# Altium PCB AICat V1.3.双面板 板厚1.6mm.PcbDoc (part 3 of 3)
Units mm, origin at the board's own origin, x right, y up, seen from the top; angles counter-clockwise.
Board outline 152.4 x 101.6 mm, 2 copper layers (Top Layer, Bottom Layer); 95 components, 81 nets, 296 pads, 205 vias.
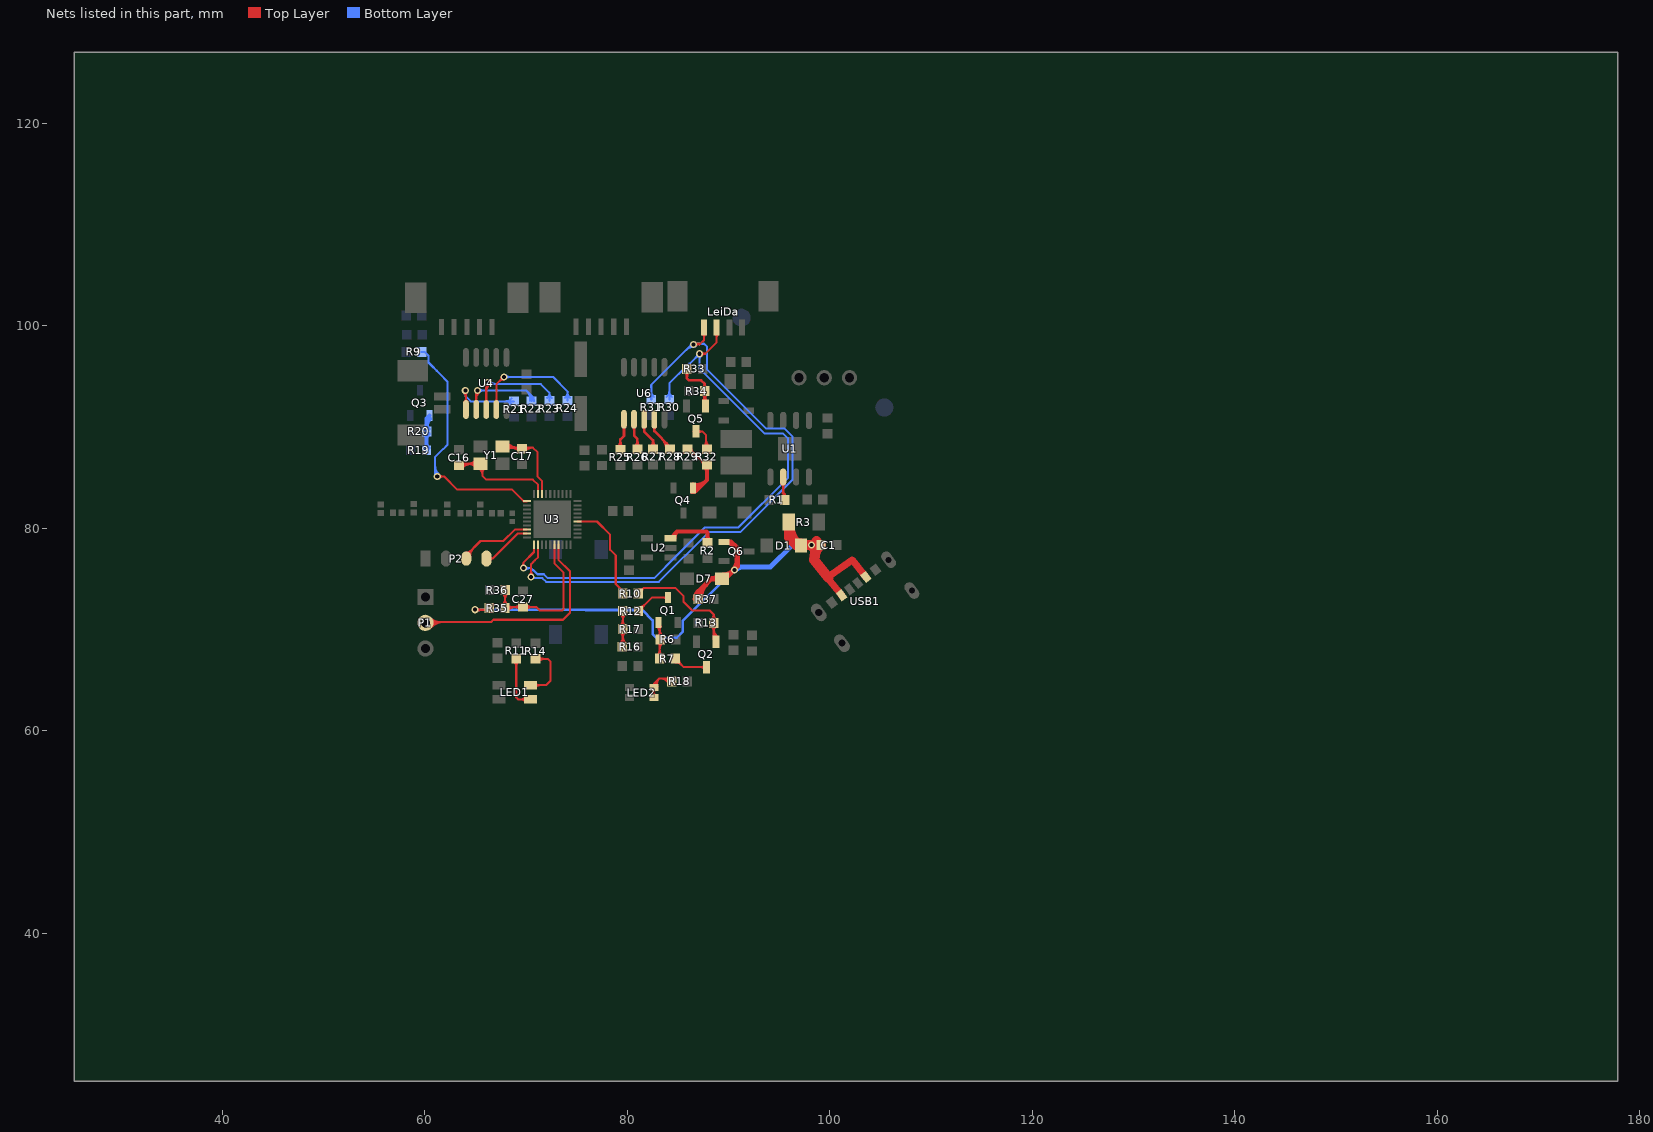
[diagram p3: the nets of this part, all layers, seen from the top]

## Via types
v1: diameter 0.7, hole 0.4, Top Layer to Bottom Layer, tented both sides, 205 vias

## Nets (pads, with @x,y where several pads share a name; then routed paths per layer and width w, separated by ;. In a path a pad name is that pad's centre, name@x,y a point inside that pad or via, vN(x,y) a via of type N, cw(c..) or ccw(c..) an arc to the next point about the centre after c; other vN are vias at no path point) (continued)
NetLED1_3: LED1.3 R11.1 | length 10.4
  Top Layer w0.203: R11.1@69.037,67.124 69.037,63.297 69.24,63.094 70.424,63.094 LED1.3@70.435,63.105 ; 69.037,66.247 cw(c69.915,66.247) 69.294,66.867 ccw(c69.915,66.247) 69.037,66.247 ; 69.037,66.247 ccw(c68.16,66.247) 68.78,66.867 cw(c68.16,66.247) 69.037,66.247 ; 69.423,63.094 ccw(c69.423,63.876) 69.977,63.323 cw(c69.423,63.876) 69.423,63.094 ; 69.477,63.094 cw(c69.477,62.387) 69.977,62.887 ccw(c69.477,62.387) 69.477,63.094
NetLED1_4: LED1.4 R14.1 | length 10.8
  Top Layer w0.203: LED1.4@70.435,64.505 71.972,64.505 72.441,64.973 72.441,66.827 72.161,67.107 70.95,67.107 R14.1@70.942,67.099 ; 71.419,64.505 cw(c71.419,65.249) 70.893,64.723 ccw(c71.419,65.249) 71.419,64.505 ; 71.419,64.505 ccw(c71.419,63.76) 70.893,64.287 cw(c71.419,63.76) 71.419,64.505 ; R14.1@71.224,66.842 cw(c71.864,66.202) 71.864,67.107 ccw(c71.864,66.202) R14.1@71.224,66.842 ; R14.1@71.224,67.356 ccw(c71.825,67.957) 71.825,67.107 cw(c71.825,67.957) R14.1@71.224,67.356
NetLED2_2: LED2.2 LED2.4 R18.2 | length 14.7
  Top Layer w0.203: LED2.4@82.632,63.279 LED2.2@82.632,64.279 82.632,64.649 ; 83.55,65.176 cw(c83.55,64.304) R18.2@84.265,64.805 ; R18.2@83.941,65.176 cw(c83.941,64.577) R18.2@84.431,64.921 ; R18.2@84.099,64.688 ccw(c83.16,64.03) 83.16,65.176 ; R18.2@84.396,64.872 84.091,65.176 83.16,65.176 ; 82.632,63.68 cw(c83.232,63.68) 82.808,64.104 ccw(c83.232,63.68) 82.632,63.68 ; 82.632,63.68 ccw(c82.033,63.68) 82.457,64.104 cw(c82.033,63.68) 82.632,63.68 ; 82.632,63.879 cw(c82.033,63.879) 82.457,63.455 ccw(c82.033,63.879) 82.632,63.879 ; 82.632,63.879 ccw(c83.232,63.879) 82.808,63.455 cw(c83.232,63.879) 82.632,63.879 ; 82.632,64.649 cw(c82.481,64.649) 82.538,64.509 ccw(c82.481,64.649) 82.632,64.649 ; 82.632,64.649 ccw(c82.783,64.649) 82.726,64.509 cw(c82.783,64.649) 82.632,64.649 ; 82.632,64.649 83.16,65.176 ; 83.16,65.176 ccw(c83.723,64.613) 82.968,64.359 cw(c83.723,64.613) 83.16,65.176 ; LED2.2@82.583,64.229 cw(c83.03,64.379) 82.696,64.713 ccw(c83.03,64.379) LED2.2@82.583,64.229 ; LED2.2@82.775,64.294 cw(c83.376,64.496) 82.928,64.945 ccw(c83.376,64.496) LED2.2@82.775,64.294
NetQ1_1: Q1.1 R6.2 R7.1 | length 15.1
  Top Layer w0.203: Q1.1@82.945,70.305 cw(c82.324,69.684) 83.202,69.684 ; Q1.1@83.047,70.305 cw(c82.671,69.929) 83.202,69.929 ; Q1.1@83.187,70.68 83.202,70.665 83.202,69.088 R6.2@83.253,69.037 83.202,68.986 R7.1@83.202,67.132 ; 83.202,70.004 cw(c83.629,70.004) Q1.1@83.327,70.305 ; 83.202,68.035 cw(c82.325,68.035) 82.945,67.414 ccw(c82.325,68.035) 83.202,68.035 ; 83.202,68.035 ccw(c84.08,68.035) 83.459,67.414 cw(c84.08,68.035) 83.202,68.035 ; R6.2@82.996,68.755 cw(c82.498,68.257) 83.202,68.257 ccw(c82.498,68.257) R6.2@82.996,68.755 ; R6.2@82.996,69.319 ccw(c82.498,69.817) 83.202,69.817 cw(c82.498,69.817) R6.2@82.996,69.319 ; 83.202,68.012 cw(c84.253,68.012) 83.51,68.755 ccw(c84.253,68.012) 83.202,68.012 ; 83.202,68.503 cw(c83.762,68.503) 83.366,68.899 ccw(c83.762,68.503) 83.202,68.503 ; 83.202,69.571 ccw(c83.762,69.571) 83.366,69.175 cw(c83.762,69.571) 83.202,69.571 ; 83.202,70.062 ccw(c84.253,70.062) 83.51,69.319 cw(c84.253,70.062) 83.202,70.062
NetQ1_3: Q1.3 R12.1 | length 10.2
  Top Layer w0.203: R12.1@81.11,71.831 81.614,72.335 ; 81.82,72.541 81.614,72.335 ; Q1.3@83.895,73.01 ccw(c83.556,72.671) 83.556,73.15 ccw(c83.556,73.629) Q1.3@83.895,73.291 ; Q1.3@84.137,73.15 Q1.3@84.035,73.15 82.429,73.15 81.614,72.335 ; R12.1@81.189,72.211 ccw(c81.288,72.661) 81.614,72.335 ; R12.1@81.189,72.211 ccw(c81.288,72.661) 81.614,72.335 ; R12.1@81.189,72.211 ccw(c81.288,72.661) 81.614,72.335 ; R12.1@81.47,71.906 cw(c81.973,71.976) 81.614,72.335 ; R12.1@81.47,71.906 cw(c81.973,71.976) 81.614,72.335 ; R12.1@81.47,71.906 cw(c81.973,71.976) 81.614,72.335 ; R12.1@81.11,72.22 ccw(c81.11,73.157) 81.773,72.494 cw(c81.11,73.157) R12.1@81.11,72.22 ; R12.1@81.474,71.856 cw(c82.291,71.856) 81.713,72.434 ccw(c82.291,71.856) R12.1@81.474,71.856
NetQ2_1: Q2.1 R10.1 R13.2 | length 21.7
  Top Layer w0.203: R10.1@81.085,73.558 81.644,74.117 ; R10.1@81.132,73.944 ccw(c81.212,74.549) 81.644,74.117 ; R10.1@81.448,73.604 cw(c82.119,73.642) 81.644,74.117 ; R13.2@88.295,70.945 ccw(c87.737,71.504) 88.527,71.504 88.149,71.882 ; R13.2@88.316,70.964 ccw(c87.875,71.478) 88.552,71.478 ; R13.2@88.527,70.663 88.527,69.019 Q2.1@88.758,68.789 ; R13.2@88.552,70.663 88.552,71.478 ; R13.2@88.789,70.964 cw(c89.23,71.478) 88.552,71.478 ; 81.644,74.117 84.734,74.117 85.573,73.279 85.573,72.72 86.411,71.882 87.046,71.882 88.149,71.882 ; 88.149,71.882 88.552,71.478 ; R13.2@88.295,70.381 cw(c87.737,69.822) 88.527,69.822 ccw(c87.737,69.822) R13.2@88.295,70.381 ; 88.527,69.699 cw(c89.491,69.699) 88.809,70.381 ccw(c89.491,69.699) 88.527,69.699 ; 88.527,69.73 ccw(c89.424,69.73) 88.79,69.096 cw(c89.424,69.73) 88.527,69.73 ; R13.2@88.527,70.221 ccw(c89.915,70.221) 88.933,69.239 cw(c89.915,70.221) R13.2@88.527,70.221
NetQ2_3: Q2.3 R7.2 | length 6.9
  Top Layer w0.203: R7.2@84.742,66.744 cw(c84.742,65.806) 85.405,66.469 ; R7.2@84.889,67.279 R7.2@84.742,67.132 85.586,66.289 Q2.3@87.808,66.289 ; R7.2@85.106,67.107 ccw(c85.923,67.107) 85.345,66.53 ; 87.208,66.289 cw(c87.208,65.689) 87.632,66.113 ccw(c87.208,65.689) 87.208,66.289 ; 87.208,66.289 ccw(c87.208,66.888) 87.632,66.464 cw(c87.208,66.888) 87.208,66.289
NetQ3_1: Q3.1 R19.1 R20.2 | length 11.8
  Bottom Layer w0.381: R19.1@60.181,87.706 60.181,90.858 Q3.1@60.475,91.153 ; 60.181,88.394 cw(c59.518,88.394) 59.986,87.925 ccw(c59.518,88.394) 60.181,88.394 ; 60.181,88.394 ccw(c60.843,88.394) 60.375,87.925 cw(c60.843,88.394) 60.181,88.394 ; R20.2@60.012,89.341 cw(c59.605,88.934) 60.181,88.934 ccw(c59.605,88.934) R20.2@60.012,89.341 ; R20.2@60.012,89.779 ccw(c59.605,90.187) 60.181,90.187 cw(c59.605,90.187) R20.2@60.012,89.779 ; 60.181,88.811 cw(c60.93,88.811) 60.4,89.341 ccw(c60.93,88.811) 60.181,88.811 ; R20.2@60.181,89.942 cw(c61.452,89.942) 60.553,90.84 ccw(c61.452,89.942) R20.2@60.181,89.942 ; 60.181,90.31 ccw(c60.93,90.31) 60.4,89.779 cw(c60.93,90.31) 60.181,90.31
NetQ4_1: Q4.1 R29.2 R32.1 | length 21.3
  Top Layer w0.203: R29.2@85.801,87.841 86.141,87.841 R32.1@87.706,86.276 ; R29.2@85.979,87.452 cw(c85.979,86.122) 86.919,87.063 ccw(c85.979,86.122) R29.2@85.979,87.452 ; R29.2@85.979,87.656 cw(c85.979,86.816) 86.572,87.41 ccw(c85.979,86.816) R29.2@85.979,87.656 ; R29.2@86.342,87.816 ccw(c86.766,87.816) 86.466,87.516 cw(c86.766,87.816) R29.2@86.342,87.816 ; 86.996,86.986 ccw(c87.834,87.824) 87.834,86.639 cw(c87.834,87.824) 86.996,86.986 ; 87.303,86.679 cw(c86.9,86.276) 87.47,86.276 ccw(c86.9,86.276) 87.303,86.679 ; 87.343,86.639 ccw(c87.834,87.13) 87.834,86.436 cw(c87.834,87.13) 87.343,86.639
  Top Layer w0.381: Q4.1@86.367,83.573 ccw(c86.462,84.09) 86.833,83.718 ; Q4.1@86.436,83.948 ccw(c86.621,84.956) 87.346,84.231 ; Q4.1@86.485,83.74 ccw(c86.485,84.634) 87.116,84.002 ; Q4.1@86.485,83.777 86.891,83.777 87.859,84.744 ; Q4.1@86.485,84.121 ccw(c86.485,85.934) 87.767,84.652 ; Q4.1@86.505,84.323 ccw(c86.781,85.822) 87.859,84.744 ; Q4.1@86.562,83.668 cw(c86.826,83.404) 86.826,83.777 ; R32.1@87.859,86.276 87.859,84.744 ; 87.859,85.613 cw(c88.521,85.613) 88.053,86.082 ccw(c88.521,85.613) 87.859,85.613 ; 87.859,85.613 ccw(c87.196,85.613) 87.664,86.082 cw(c87.196,85.613) 87.859,85.613
NetQ5_1: Q5.1 R33.1 R34.2 | length 14.2
  Top Layer w0.203: R33.1@85.768,95.733 R33.1@85.768,95.936 ; Q5.1@87.46,92.667 Q5.1@87.691,92.436
  Top Layer w0.254: R33.1@85.895,95.733 85.895,94.801 86.081,94.615 87.3,94.615 87.638,94.277 ; Q5.1@87.638,92.08 87.638,94.277 ; 85.895,94.892 cw(c86.711,94.892) 86.134,95.469 ccw(c86.711,94.892) 85.895,94.892 ; 85.895,94.892 ccw(c85.079,94.892) 85.656,95.469 cw(c85.079,94.892) 85.895,94.892 ; 87.638,92.707 cw(c88.454,92.707) 87.877,93.284 ccw(c88.454,92.707) 87.638,92.707 ; 87.638,92.707 ccw(c86.822,92.707) 87.399,93.284 cw(c86.822,92.707) 87.638,92.707 ; 87.638,94.277 cw(c87.075,94.277) 87.427,93.837 ccw(c87.075,94.277) 87.638,94.277 ; 87.638,94.277 ccw(c88.201,94.277) 87.849,93.837 cw(c88.201,94.277) 87.638,94.277 ; R34.2@87.638,93.144 ccw(c88.531,93.144) 87.899,92.513 cw(c88.531,93.144) R34.2@87.638,93.144
NetQ5_3: Q5.3 R32.2 | length 7.4
  Top Layer w0.203: Q5.3@86.563,89.535 87.452,89.535 ; Q5.3@86.967,89.405 cw(c87.282,89.09) 87.282,89.535 ; Q5.3@86.976,89.747 ccw(c87.452,90.176) 87.452,89.535 ; R32.2@87.706,87.816 87.757,87.867 87.757,89.23 87.452,89.535 ; R32.2@87.577,88.073 ccw(c87.141,88.508) 87.757,88.508 cw(c87.141,88.508) R32.2@87.577,88.073 ; 87.757,88.388 ccw(c88.405,88.388) 87.947,87.929 cw(c88.405,88.388) 87.757,88.388 ; 87.757,88.878 ccw(c88.896,88.878) 88.091,88.073 cw(c88.896,88.878) 87.757,88.878
NetR1_2: R1.2 U1.2 | length 6.3
  Top Layer w0.254: U1.2@95.402,85.649 95.402,83.49 95.529,83.363 ; 95.402,84.09 cw(c95.832,84.09) 95.528,84.394 ccw(c95.832,84.09) 95.402,84.09 ; 95.402,84.09 ccw(c94.973,84.09) 95.277,84.394 cw(c94.973,84.09) 95.402,84.09 ; 95.376,83.516 cw(c94.995,83.135) 95.464,82.87 ccw(c94.995,83.135) 95.376,83.516 ; 95.458,83.435 cw(c95.174,83.151) 95.474,82.885 ccw(c95.174,83.151) 95.458,83.435
NetR2_2: R2.2 U2.3 | length 8.6
  Top Layer w0.381: U2.3@84.256,79.013 84.923,79.68 ; R2.2@87.935,78.57 87.935,79.578 87.833,79.68 84.923,79.68 ; 84.923,79.68 ccw(c85.548,79.055) 84.666,79.017 cw(c85.548,79.055) 84.923,79.68 ; 87.935,79.233 cw(c87.272,79.233) 87.741,78.764 ccw(c87.272,79.233) 87.935,79.233 ; 87.935,79.233 ccw(c88.598,79.233) 88.129,78.764 cw(c88.598,79.233) 87.935,79.233
NetR12_2: R12.2 R16.2 R17.1 | length 15.5
  Top Layer w0.203: R16.2@79.262,68.583 ccw(c78.519,69.326) 79.57,69.326 ccw(c80.621,69.326) R16.2@79.878,68.583 ; R16.2@79.364,68.583 ccw(c78.866,69.08) 79.57,69.08 ccw(c80.274,69.08) R16.2@79.776,68.583 ; R16.2@79.406,68.439 ccw(c79.01,68.835) 79.57,68.835 ccw(c80.13,68.835) R16.2@79.734,68.439 ; R12.2@79.57,71.831 79.57,68.351 R16.2@79.621,68.301 ; 79.57,70.929 cw(c80.447,70.929) 79.827,71.549 ccw(c80.447,70.929) 79.57,70.929 ; 79.57,70.929 ccw(c78.693,70.929) 79.313,71.549 cw(c78.693,70.929) 79.57,70.929 ; R17.1@79.288,69.771 cw(c78.606,69.09) 79.57,69.09 ccw(c78.606,69.09) R17.1@79.288,69.771 ; R17.1@79.288,70.335 ccw(c78.606,71.017) 79.57,71.017 cw(c78.606,71.017) R17.1@79.288,70.335 ; 79.57,69.212 cw(c80.361,69.212) 79.802,69.771 ccw(c80.361,69.212) 79.57,69.212 ; 79.57,70.894 ccw(c80.361,70.894) 79.802,70.335 cw(c80.361,70.894) 79.57,70.894
NetR21_1: R21.1 U4.1 | length 15
  Top Layer w0.203: v1(64.008,93.599) 64.077,93.53 U4.1@64.077,91.732 ; 64.077,92.811 cw(c63.646,92.811) 63.951,92.506 ccw(c63.646,92.811) 64.077,92.811 ; 64.077,92.811 ccw(c64.508,92.811) 64.203,92.506 cw(c64.508,92.811) 64.077,92.811 ; v1@63.832,93.423 cw(c63.242,92.833) 64.077,92.833 ccw(c63.242,92.833) v1@63.832,93.423 ; 64.077,93.166 cw(c64.441,93.166) 64.184,93.423 ccw(c64.441,93.166) 64.077,93.166
  Bottom Layer w0.203: v1(64.008,93.599) 64.008,93.066 ; R21.1@68.834,92.54 64.533,92.54 64.008,93.066 ; 64.008,93.066 cw(c64.456,93.066) 64.168,93.409 ccw(c64.456,93.066) 64.008,93.066 ; 64.008,93.066 ccw(c63.56,93.066) 63.848,93.409 cw(c63.56,93.066) 64.008,93.066 ; 67.932,92.54 cw(c67.932,91.663) 68.552,92.283 ccw(c67.932,91.663) 67.932,92.54 ; 67.932,92.54 ccw(c67.932,93.418) 68.552,92.797 cw(c67.932,93.418) 67.932,92.54
NetR22_1: R22.1 U4.2 | length 18.7
  Top Layer w0.203: U4.2@65.077,91.732 65.077,93.474 v1(65.202,93.599) ; 65.077,92.811 cw(c64.646,92.811) 64.951,92.506 ccw(c64.646,92.811) 65.077,92.811 ; 65.077,92.811 ccw(c65.508,92.811) 65.203,92.506 cw(c65.508,92.811) 65.077,92.811 ; 65.077,92.698 cw(c66.103,92.698) 65.377,93.423 ccw(c66.103,92.698) 65.077,92.698 ; 65.077,93.189 cw(c65.612,93.189) 65.234,93.567 ccw(c65.612,93.189) 65.077,93.189
  Bottom Layer w0.203: v1(65.202,93.599) 70.053,93.599 70.561,93.091 R22.1@70.561,92.566 ; 65.801,93.599 cw(c65.801,94.199) 65.377,93.775 ccw(c65.801,94.199) 65.801,93.599 ; 65.801,93.599 ccw(c65.801,92.999) 65.377,93.423 cw(c65.801,92.999) 65.801,93.599 ; 70.057,93.595 cw(c69.244,92.782) 70.378,92.592 ccw(c69.244,92.782) 70.057,93.595 ; 70.336,93.316 cw(c69.722,92.702) 70.579,92.558 ccw(c69.722,92.702) 70.336,93.316 ; 70.615,93.037 cw(c70.2,92.622) 70.779,92.525 ccw(c70.2,92.622) 70.615,93.037
NetR23_1: R23.1 U4.3 | length 19
  Top Layer w0.203: U4.3@66.077,91.732 66.077,94.246 v1(66.218,94.386) ; 66.077,92.811 cw(c65.646,92.811) 65.951,92.506 ccw(c65.646,92.811) 66.077,92.811 ; 66.077,92.811 ccw(c66.508,92.811) 66.203,92.506 cw(c66.508,92.811) 66.077,92.811 ; 66.077,93.447 cw(c67.157,93.447) 66.393,94.211 ccw(c67.157,93.447) 66.077,93.447 ; 66.077,93.937 cw(c66.667,93.937) 66.25,94.354 ccw(c66.667,93.937) 66.077,93.937
  Bottom Layer w0.203: v1@66.263,94.24 71.47,94.24 72.314,93.396 ; R23.1@72.314,92.591 72.314,93.396 ; 72.314,93.396 cw(c71.604,93.396) 72.073,92.864 ccw(c71.604,93.396) 72.314,93.396 ; 72.314,93.396 ccw(c73.023,93.396) 72.554,92.864 cw(c73.023,93.396) 72.314,93.396 ; v1@66.25,94.418 ccw(c66.681,94.85) 66.681,94.24 cw(c66.681,94.85) v1@66.25,94.418 ; v1@66.393,94.562 ccw(c67.172,95.341) 67.172,94.24 cw(c67.172,95.341) v1@66.393,94.562
NetR24_1: R24.1 U4.4 | length 18.9
  Top Layer w0.203: U4.4@67.077,91.732 67.077,94.204 v1(67.818,94.945) ; 67.077,92.811 cw(c66.646,92.811) 66.951,92.506 ccw(c66.646,92.811) 67.077,92.811 ; 67.077,92.811 ccw(c67.508,92.811) 67.203,92.506 cw(c67.508,92.811) 67.077,92.811 ; 67.394,94.521 cw(c67.818,94.097) 67.818,94.697 ccw(c67.818,94.097) 67.394,94.521 ; 67.394,94.521 ccw(c66.97,94.945) 67.57,94.945 cw(c66.97,94.945) 67.394,94.521
  Bottom Layer w0.203: v1(67.818,94.945) 72.669,94.945 74.143,93.472 74.092,93.421 ; R24.1@74.092,92.616 74.092,93.421 ; 68.418,94.945 cw(c68.418,95.545) 67.994,95.121 ccw(c68.418,95.545) 68.418,94.945 ; 68.418,94.945 ccw(c68.418,94.346) 67.994,94.77 cw(c68.418,94.346) 68.418,94.945 ; 74.092,93.421 cw(c73.382,93.421) 73.851,92.889 ccw(c73.382,93.421) 74.092,93.421 ; 74.092,93.421 ccw(c74.801,93.421) 74.332,92.889 cw(c74.801,93.421) 74.092,93.421
NetR25_1: R25.1 U6.1 | length 6.9
  Top Layer w0.254: R25.1@79.324,87.765 79.324,88.773 79.68,89.129 79.68,90.76 U6.1@79.673,90.767 ; 79.324,88.581 cw(c78.508,88.581) 79.085,88.004 ccw(c78.508,88.581) 79.324,88.581 ; 79.324,88.581 ccw(c80.14,88.581) 79.563,88.004 cw(c80.14,88.581) 79.324,88.581 ; U6.1@79.564,90.012 cw(c79.286,89.733) 79.68,89.733 ccw(c79.286,89.733) U6.1@79.564,90.012 ; 79.68,89.768 cw(c80.025,89.768) 79.781,90.012 ccw(c80.025,89.768) 79.68,89.768
NetR26_1: R26.1 U6.2 | length 6.8
  Top Layer w0.254: U6.2@80.673,90.767 80.673,89.152 81.001,88.824 81.001,87.816 R26.1@81.026,87.79 ; 80.673,89.75 cw(c81.042,89.75) 80.781,90.012 ccw(c81.042,89.75) 80.673,89.75 ; 80.673,89.75 ccw(c80.303,89.75) 80.564,90.012 cw(c80.303,89.75) 80.673,89.75 ; R26.1@80.762,88.029 ccw(c80.186,88.605) 81.001,88.605 cw(c80.186,88.605) R26.1@80.762,88.029 ; 81.001,88.607 ccw(c81.818,88.607) 81.24,88.029 cw(c81.818,88.607) 81.001,88.607
NetR27_1: R27.1 U6.3 | length 7
  Top Layer w0.254: U6.3@81.673,90.767 81.673,89.549 82.55,88.671 R27.1@82.55,87.816 ; 81.673,89.75 cw(c82.042,89.75) 81.781,90.012 ccw(c82.042,89.75) 81.673,89.75 ; 81.673,89.75 ccw(c81.303,89.75) 81.564,90.012 cw(c81.303,89.75) 81.673,89.75 ; 82.55,88.632 cw(c81.734,88.632) 82.311,88.055 ccw(c81.734,88.632) 82.55,88.632 ; 82.55,88.632 ccw(c83.366,88.632) 82.789,88.055 cw(c83.366,88.632) 82.55,88.632
NetR28_1: R28.1 U6.4 | length 8.3
  Top Layer w0.203: R28.1@83.97,87.835 R28.1@83.97,87.937
  Top Layer w0.254: U6.4@82.673,90.767 82.673,89.59 84.226,88.036 R28.1@84.226,87.816 ; 82.673,89.75 cw(c83.042,89.75) 82.781,90.012 ccw(c83.042,89.75) 82.673,89.75 ; 82.673,89.75 ccw(c82.303,89.75) 82.564,90.012 cw(c82.303,89.75) 82.673,89.75 ; 83.451,88.812 cw(c82.454,87.816) 83.863,87.816 ccw(c82.454,87.816) 83.451,88.812 ; 83.884,88.378 cw(c83.322,87.816) 84.117,87.816 ccw(c83.322,87.816) 83.884,88.378
NTC_CON: R9.2 U3.31 | length 29.6
  Top Layer w0.203: v1(61.239,85.115) 61.925,85.115 63.221,83.82 68.631,83.82 69.779,82.671 U3.31@70.098,82.671 ; 61.839,85.115 cw(c61.839,85.715) 61.415,85.291 ccw(c61.839,85.715) 61.839,85.115 ; 61.839,85.115 ccw(c61.839,84.516) 61.415,84.94 cw(c61.839,84.516) 61.839,85.115
  Bottom Layer w0.203: R9.2@59.698,97.409 60.02,97.409 60.376,97.053 60.376,96.368 61.468,95.275 ; 61.189,95.555 61.468,95.275 ; v1(61.239,85.115) 61.036,85.319 61.036,87.046 61.798,87.808 61.824,87.808 62.255,88.24 62.255,94.488 61.468,95.275 ; 61.036,85.715 ccw(c61.839,85.715) 61.271,85.147 cw(c61.839,85.715) 61.036,85.715 ; 61.036,86.206 ccw(c62.33,86.206) 61.415,85.291 cw(c62.33,86.206) 61.036,86.206
RX_DEBUG: P2.3 U3.38 | length 11.6
  Top Layer w0.203: P2.3@64.096,77.013 64.096,77.33 65.507,78.74 67.767,78.74 68.899,79.871 U3.38@70.098,79.871 ; P2.3@64.096,77.611 ccw(c64.096,78.291) 64.577,77.81 cw(c64.096,78.291) P2.3@64.096,77.611 ; P2.3@64.292,77.213 cw(c65.045,77.213) 64.512,77.746 ccw(c65.045,77.213) P2.3@64.292,77.213 ; P2.3@64.495,77.213 cw(c65.739,77.213) 64.859,78.093 ccw(c65.739,77.213) P2.3@64.495,77.213
RX_LEIDA: LeiDa.4 R31.1 U3.2 | length 73.8
  Top Layer w0.203: v1@70.335,75.376 ccw(c69.911,75.8) 70.51,75.8 ccw(c71.11,75.8) v1@70.686,75.376 ; v1(70.51,75.2) 70.51,76.454 70.884,76.827 ; 70.663,76.606 70.884,76.827 ; U3.2@71.197,78.372 71.197,77.141 70.884,76.827 ; v1@86.538,98.222 87.224,98.222 ; v1@86.713,98.046 cw(c87.137,97.622) 87.137,98.222 ; v1@86.713,98.321 ccw(c86.954,98.561) 86.954,98.222 ; v1@86.713,98.347 ccw(c87.137,98.771) 87.137,98.171 ; v1@86.73,97.988 cw(c87.224,97.584) 87.224,98.222 ; LeiDa.4@87.583,99.821 87.583,98.582 87.224,98.222 ; 87.583,98.843 cw(c88.062,98.843) 87.724,99.181 ccw(c88.062,98.843) 87.583,98.843 ; 87.583,98.843 ccw(c87.104,98.843) 87.443,99.181 cw(c87.104,98.843) 87.583,98.843
  Bottom Layer w0.203: v1(70.51,75.2) 70.628,75.082 71.607,75.082 71.988,74.701 83.109,74.701 88.028,79.621 91.164,79.621 96.311,84.768 96.311,89.077 95.548,89.84 93.719,89.84 87.89,95.669 87.89,97.911 87.579,98.222 v1@86.538,98.222 ; R31.1@82.372,92.718 82.372,94.158 v1@86.436,98.222 ; 85.81,97.596 cw(c86.538,96.868) v1@86.538,97.897 ; 85.94,97.726 cw(c86.538,97.128) v1@86.538,97.973 ; 86.157,97.943 cw(c86.538,97.562) v1@86.538,98.1 ; 86.186,97.971 ccw(c85.935,98.222) v1@86.289,98.222 ; v1@86.713,97.97 cw(c87.321,97.362) 87.321,98.222 ; v1@86.713,98.046 cw(c87.137,97.622) 87.137,98.222 ; v1@86.713,98.321 ccw(c86.954,98.561) 86.954,98.222 ; v1@86.713,98.347 ccw(c87.137,98.771) 87.137,98.171 ; 82.372,93.595 cw(c81.495,93.595) 82.115,92.975 ccw(c81.495,93.595) 82.372,93.595 ; 82.372,93.595 ccw(c83.25,93.595) 82.629,92.975 cw(c83.25,93.595) 82.372,93.595
  other v1: 86.538,98.146
SWS: P1.3 U3.7 | length 32.4
  Top Layer w0.203: P1.3@60.071,70.663 60.147,70.739 66.243,70.739 66.548,70.739 66.777,70.968 73.66,70.968 74.346,71.653 74.346,75.763 73.197,76.912 U3.7@73.197,78.372 ; P1.3@60.277,70.456 cw(c60.96,69.774) 60.96,70.739 ccw(c60.96,69.774) P1.3@60.277,70.456 ; P1.3@60.421,70.313 cw(c61.45,69.283) 61.45,70.739 ccw(c61.45,69.283) P1.3@60.421,70.313 ; P1.3@60.421,71.013 ccw(c61.083,71.674) 61.083,70.739 cw(c61.083,71.674) P1.3@60.421,71.013 ; P1.3@60.565,70.169 cw(c61.941,68.793) 61.941,70.739 ccw(c61.941,68.793) P1.3@60.565,70.169 ; P1.3@60.565,71.157 ccw(c61.573,72.165) 61.573,70.739 cw(c61.573,72.165) P1.3@60.565,71.157
TX_DEBUG: P2.4 U3.39 | length 6.2
  Top Layer w0.203: P2.4@66.096,77.013 66.7,77.013 ; U3.39@70.098,79.471 69.159,79.471 66.7,77.013 ; 66.7,77.013 cw(c66.7,77.271) 66.463,77.17 ccw(c66.7,77.271) 66.7,77.013 ; 66.7,77.013 ccw(c66.7,76.754) 66.463,76.856 cw(c66.7,76.754) 66.7,77.013
TX_LEIDA: LeiDa.3 R30.1 U3.1 | length 71.8
  Top Layer w0.203: v1@69.586,76.252 ccw(c69.28,76.606) 69.748,76.606 ; v1(69.748,76.064) 69.748,76.606 ; v1@69.911,76.252 cw(c70.217,76.606) 69.748,76.606 ; U3.1@70.797,78.372 70.797,77.655 69.748,76.606 ; v1(87.147,97.231) 87.706,97.231 ; LeiDa.3@88.834,99.821 88.834,98.359 87.706,97.231 ; 87.706,97.231 cw(c87.706,97.735) 87.332,97.398 ccw(c87.706,97.735) 87.706,97.231 ; 87.706,97.231 ccw(c87.706,96.727) 87.332,97.065 cw(c87.706,96.727) 87.706,97.231 ; 88.834,98.843 cw(c89.313,98.843) 88.974,99.181 ccw(c89.313,98.843) 88.834,98.843 ; 88.834,98.843 ccw(c88.355,98.843) 88.693,99.181 cw(c88.355,98.843) 88.834,98.843
  Bottom Layer w0.203: v1(69.748,76.064) 70.504,76.064 70.738,75.829 70.771,75.829 71.137,75.463 71.764,75.463 72.145,75.082 82.652,75.082 84.834,77.265 ; v1@69.924,75.888 cw(c70.348,75.464) 70.348,76.064 cw(c70.348,76.663) v1@69.924,76.239 ; R30.1@84.15,92.718 84.15,94.317 85.899,96.066 ; 84.633,77.064 84.834,77.265 ; 86.113,96.281 85.899,96.066 ; 84.15,93.595 cw(c83.273,93.595) 83.893,92.975 ccw(c83.273,93.595) 84.15,93.595 ; 84.15,93.595 ccw(c85.028,93.595) 84.407,92.975 cw(c85.028,93.595) 84.15,93.595 ; 84.834,77.265 87.647,80.078 90.975,80.078 95.854,84.957 95.854,88.887 95.39,89.352 93.56,89.352 87.147,95.765 v1(87.147,97.231) 85.983,96.066 85.899,96.066 ; 86.723,96.807 cw(c87.147,96.383) 87.147,96.983 ccw(c87.147,96.383) 86.723,96.807 ; 86.723,96.807 ccw(c86.299,97.231) 86.899,97.231 cw(c86.299,97.231) 86.723,96.807 ; 87.147,96.632 cw(c87.747,96.632) 87.323,97.056 ccw(c87.747,96.632) 87.147,96.632 ; 87.147,96.632 ccw(c86.548,96.632) 86.972,97.056 cw(c86.548,96.632) 87.147,96.632
USB_DEC: C27.2 R35.2 R36.1 U3.6 | length 22
  Top Layer w0.203: R35.2@67.671,72.393 ccw(c67.05,73.013) 67.928,73.013 ccw(c68.805,73.013) 68.185,72.393 ccw(c68.578,72.786) 68.578,72.23 ; R36.1@67.696,73.607 cw(c67.137,73.047) 67.928,73.047 ; 67.928,72.925 cw(c68.892,72.925) R36.1@68.21,73.607 ; R36.1@67.953,73.889 67.928,73.863 R35.2@67.928,72.111 68.047,72.23 C27.2@69.723,72.23 71.001,72.23 71.349,71.882 73.558,71.882 73.711,72.034 73.711,75.616 72.797,76.53 U3.6@72.797,78.372 ; R35.2@68.041,72.022 cw(c68.541,71.522) 68.541,72.23 ; R35.2@68.185,71.879 cw(c69.032,71.031) 69.032,72.23 ; C27.2@69.441,71.973 ccw(c68.821,71.352) 68.821,72.23 ccw(c68.821,73.107) C27.2@69.441,72.487 ; C27.2@70.005,71.973 cw(c70.625,71.352) 70.625,72.23 cw(c70.625,73.107) C27.2@70.005,72.487
V_BAT_CON: R10.2 U3.15 | length 10.5
  Top Layer w0.203: U3.15@75.096,80.671 77.012,80.671 78.308,79.375 78.308,77.876 78.867,77.318 78.867,74.498 R10.2@79.35,74.016 ; 79.104,74.262 cw(c78.426,73.583) R10.2@79.385,73.583 ; R10.2@79.329,74.036 ccw(c79.545,74.252) R10.2@79.545,73.947
VCC_USB: C1.2 D1.2 D7.1 Q6.1 R3.2 R35.1 R37.2 USB1.A9 USB1.B9 | length 84.5
  Top Layer w0.254: v1(64.973,71.958) 66.235,71.958 R35.1@66.388,72.111 ; v1@65.131,71.801 cw(c65.512,71.42) 65.512,71.958 cw(c65.512,72.497) v1@65.131,72.116
  Top Layer w0.508: R37.2@86.715,73.025 cw(c87.697,73.025) 87.003,73.719 ; R37.2@86.863,73.174 ccw(c86.503,73.534) 87.012,73.534 ccw(c87.522,73.534) R37.2@87.162,73.174 ; R37.2@87.012,73 87.012,73.728 88.302,75.018 D7.1@89.362,75.018 89.648,75.018 90.856,76.225 90.856,78.029 90.223,78.662 Q6.1@89.553,78.662 ; R37.2@87.223,73.025 cw(c89.431,73.025) 87.87,74.586 ; D7.1@89.017,74.773 ccw(c88.426,74.183) 88.426,75.018 ccw(c88.426,75.853) D7.1@89.017,75.263 ; D7.1@89.462,75.364 ccw(c89.462,76.65) v1@90.371,75.741 ; Q6.1@89.788,78.616 cw(c89.788,77.454) 90.609,78.276 ; Q6.1@89.799,78.617 cw(c89.969,77.973) 90.44,78.444 ; v1@90.509,75.963 ccw(c89.67,76.801) 90.856,76.801
  Top Layer w0.7: 99.815,75.08 USB1.B9@101.164,73.386 ; 99.823,75.183 102.211,76.885 USB1.A9@103.559,75.191
  Top Layer w1: R3.2@95.956,80.516 ccw(c98.859,80.516) D1.2@96.806,78.463 ; R3.2@95.956,80.607 95.956,79.072 96.735,78.292 96.777,78.334 v1(98.196,78.334) 98.628,78.334 ; 96.222,78.806 ccw(c97.005,79.589) D1.2@97.154,78.491 ; v1@98.248,78.193 ccw(c98.022,78.809) C1.2@98.674,78.735 ; 98.577,77.885 cw(c99.247,77.809) C1.2@98.827,78.336 ; C1.2@98.849,78.334 98.628,78.334 ; 99.841,75.15 98.463,76.881 98.623,78.285 98.628,78.334 ; 98.505,77.25 cw(c100.116,77.067) 99.106,78.336 ccw(c100.116,77.067) 98.505,77.25
  Bottom Layer w0.254: v1(64.973,71.958) 75.87,71.958 75.895,71.933 81.483,71.933 82.499,70.917 82.499,69.545 82.855,69.19 84.887,69.19 85.471,69.774 85.471,70.841 v1@90.576,75.946 ; v1@65.131,71.801 cw(c65.512,71.42) 65.512,71.958 cw(c65.512,72.497) v1@65.131,72.116 ; 90.109,75.479 cw(c90.576,75.011) v1@90.576,75.672 ; 90.232,75.601 ccw(c89.938,75.895) v1@90.353,75.895
  Bottom Layer w0.508: v1@90.576,75.946 90.805,76.175 94.129,76.175 96.288,78.334 v1(98.196,78.334) ; v1@90.644,75.827 cw(c91.483,74.989) 91.483,76.175
  other v1: 90.576,75.895
XC1: C16.2 U3.29 Y1.1 | length 25.1
  Top Layer w0.203: C16.2@63.398,86.2 63.574,86.376 65.699,86.376 65.699,85.203 66.091,84.811 70.688,84.811 71.197,84.302 U3.29@71.197,83.371 ; 64.192,86.376 cw(c64.192,85.172) 65.043,86.023 ccw(c64.192,85.172) 64.192,86.376 ; 64.192,86.376 ccw(c64.192,87.579) 65.043,86.728 cw(c64.192,87.579) 64.192,86.376 ; 64.683,86.376 cw(c64.683,85.663) 65.187,86.167 ccw(c64.683,85.663) 64.683,86.376 ; 64.683,86.376 ccw(c64.683,87.088) 65.187,86.584 cw(c64.683,87.088) 64.683,86.376 ; C16.2@63.537,86.086 cw(c64.235,85.388) 64.235,86.376 ccw(c64.235,85.388) C16.2@63.537,86.086 ; C16.2@63.68,85.943 cw(c64.726,84.897) 64.726,86.376 ccw(c64.726,84.897) C16.2@63.68,85.943 ; C16.2@63.68,86.457 ccw(c63.876,86.652) 63.876,86.376 cw(c63.876,86.652) C16.2@63.68,86.457 ; Y1.1@65.303,85.972 cw(c64.744,85.198) 65.699,85.198 ccw(c64.744,85.198) Y1.1@65.303,85.972 ; Y1.1@65.422,86.136 cw(c65.032,85.596) 65.699,85.596 ccw(c65.032,85.596) Y1.1@65.422,86.136 ; 65.699,85.422 cw(c66.549,85.422) 65.948,86.023 ccw(c66.549,85.422) 65.699,85.422
XC2: C17.2 U3.28 Y1.3 | length 20.8
  Top Layer w0.203: Y1.3@67.899,88.076 68.014,87.96 70.688,87.96 ; U3.28@71.597,83.371 71.597,84.653 71.145,85.104 71.145,87.503 70.688,87.96 ; 70.688,87.96 ccw(c70.688,86.908) 69.914,87.62 cw(c70.688,86.908) 70.688,87.96 ; Y1.3@68.004,88.284 ccw(c68.787,89.067) 68.787,87.96 cw(c68.787,89.067) Y1.3@68.004,88.284 ; Y1.3@68.148,87.723 cw(c68.72,87.151) 68.72,87.96 ccw(c68.72,87.151) Y1.3@68.148,87.723 ; Y1.3@68.148,88.428 ccw(c69.278,89.558) 69.278,87.96 cw(c69.278,89.558) Y1.3@68.148,88.428 ; 68.493,87.96 cw(c68.493,86.763) 69.339,87.61 ccw(c68.493,86.763) 68.493,87.96 ; 68.945,87.96 ccw(c68.945,88.518) 69.339,88.124 cw(c68.945,88.518) 68.945,87.96 ; 68.984,87.96 cw(c68.984,87.254) 69.483,87.753 ccw(c68.984,87.254) 68.984,87.96 ; C17.2@69.764,87.758 cw(c70.225,87.334) 70.225,87.96 ccw(c70.225,87.334) C17.2@69.764,87.758 ; C17.2@69.903,88.124 ccw(c70.298,88.518) 70.298,87.96 cw(c70.298,88.518) C17.2@69.903,88.124
pads on no net: LeiDa.5 LeiDa.6 M1.6 M1.7 M2.6 M2.7 U1.6 U2.4 U3.33 U3.35 U3.36 U3.37 U3.40

## Polygon pours and split planes (outlines as drawn)
GND on Top Layer "Bottom Layer-No Net" (solid, remove dead copper, pour order 1000): 55.093,99.67 55.149,99.619 98.008,99.619 98.008,104.669 98.064,104.72 109.47,104.72 109.47,82.051 115.697,76.427 115.697,73.381 115.613,73.381 113.672,71.628 102.086,61.163 64.289,61.163 58.828,61.163 55.1,64.53
GND on Bottom Layer "Bottom Layer-No Net" (solid, remove dead copper, pour order 1001): 55.093,104.72 55.1,104.713 55.1,64.53 55.106,64.53 57.48,62.382 58.913,61.087 94.304,61.087 101.326,61.087 114.724,73.203 114.808,73.279 114.808,75.057 114.808,76.937 109.415,81.813 109.403,81.824 109.403,104.72

## Keep-outs
Keep-Out Layer:
  circle w0.025: c96.685,67.72 r0.8
  circle w0.025: c101.201,81.72 r0.8
  circle w0.025: c93.201,73.72 r1.35
  circle w0.025: c100.201,100.72 r1.35
  circle w0.025: c50.201,72.72 r1.35
  circle w0.025: c50.201,100.72 r1.35
  lines w0.025: 104.205,104.72 46.196,104.72 ; 46.196,104.72 109.468,104.72 109.468,86.666 ccw(c110.201,81.72) 109.468,76.774 109.468,73.464 104.205,69.3 cw(c82.333,99.73) 103.196,68.599 cw(c82.155,99.995) 101.325,67.423 100.779,67.108 100.372,66.88 100.009,66.682 99.691,66.514 99.421,66.373 99.148,66.234 cw(c80.806,102.479) 97.42,65.41 96.843,65.156 96.391,64.965 95.986,64.799 95.632,64.658 95.302,64.53 94.996,64.414 94.688,64.299 94.349,64.176 93.978,64.045 93.574,63.907 93.136,63.762 92.664,63.611 92.127,63.446 91.523,63.268 90.819,63.072 90.292,62.933 90.073,62.877 89.854,62.822 89.602,62.76 89.349,62.7 89.064,62.633 88.777,62.568 88.457,62.497 88.104,62.421 87.717,62.341 87.263,62.25 86.709,62.146 85.891,62.002 85.2,61.89 85.002,61.86 84.771,61.825 84.54,61.792 84.309,61.759 84.078,61.728 83.813,61.693 83.549,61.659 83.284,61.626 82.987,61.591 82.656,61.554 82.326,61.518 81.964,61.481 81.536,61.44 81.044,61.396 80.358,61.342 79.709,61.297 79.225,61.268 78.807,61.246 78.423,61.227 78.072,61.213 77.753,61.201 77.467,61.191 77.182,61.183 76.929,61.177 76.677,61.171 76.424,61.167 76.204,61.164 75.984,61.161 75.764,61.159 75.576,61.158 75.388,61.157 75.201,61.157 75.013,61.157 74.825,61.158 74.637,61.159 74.417,61.161 74.197,61.164 73.977,61.167 73.725,61.171 73.472,61.177 73.219,61.183 72.934,61.191 72.648,61.201 72.33,61.213 71.978,61.227 71.594,61.246 71.176,61.268 70.692,61.297 70.043,61.342 69.357,61.396 68.865,61.44 68.438,61.481 68.075,61.518 67.745,61.554 67.415,61.591 67.117,61.626 66.853,61.659 66.588,61.693 66.324,61.728 66.092,61.759 65.861,61.792 65.63,61.825 65.399,61.86 65.201,61.89 64.511,62.002 63.692,62.146 63.138,62.25 62.685,62.341 62.297,62.421 61.944,62.497 61.624,62.568 61.337,62.633 61.052,62.7 60.799,62.76 60.548,62.822 60.328,62.877 60.11,62.933 59.583,63.072 58.878,63.268 58.274,63.446 57.737,63.611 57.265,63.762 56.828,63.907 56.424,64.045 56.053,64.176 55.713,64.299 55.405,64.414 55.099,64.53 54.769,64.658 54.415,64.799 54.011,64.965 53.558,65.156 52.981,65.41 cw(c69.596,102.479) 51.253,66.234 50.981,66.373 50.71,66.514 50.393,66.682 50.03,66.88 49.622,67.108 49.077,67.423 cw(c68.246,99.995) 47.205,68.599 cw(c68.068,99.73) 46.196,69.3 46.196,104.72

## Other copper
Top Layer:
  region: 53.144,92.916 53.144,93.416 47.817,93.416 47.817,92.916
  region: 48.214,85.941 48.214,86.442 47.827,86.442 47.827,85.941
  region: 48.317,93.416 47.817,93.416 47.817,90.609 48.317,90.609
  region: 51.828,90.587 51.828,91.087 47.817,91.087 47.817,90.587
  region: 51.828,91.056 51.328,91.056 51.328,88.26 51.828,88.26
  region: 51.802,88.26 51.802,88.76 47.827,88.76 47.827,88.26
  region: 48.328,88.737 47.828,88.737 47.828,85.941 48.328,85.941
  region: 51.828,85.944 51.828,86.444 47.848,86.444 47.848,85.944
  region: 51.828,86.416 51.328,86.416 51.328,83.619 51.828,83.619
  region: 51.747,83.617 51.747,84.117 47.83,84.117 47.83,83.617
  region: 48.325,84.117 47.825,84.117 47.825,78.923 48.325,78.923
  region net NetANT1_1: 55.397,81.273 55.397,81.773 48.117,81.773 48.117,81.273
  region: 48.038,79.423 48.038,78.923 55.321,78.923 55.321,79.423
  rectangle net GND: 100.99,85.319 103.632,96.977
  rectangle net GND: 93.193,86.487 101.727,89.078
  rectangle net BAT+: 83.261,94.996 84.125,100.203
  rectangle net BAT+: 82.372,98.73 84.125,100.432
  rectangle net BAT+: 67.818,95.987 74.6,99.746
  rectangle net BAT+: 73.762,94.971 75.54,100.457
  rectangle net BAT+: 73.762,98.704 74.752,100.228
  rectangle net BAT+: 60.935,97.003 62.205,101.854
  rectangle net BAT+: 81.636,99.187 82.906,100.127
  rectangle net NetBAT1_2: 98.628,93.853 100.254,95.936
  rectangle net GND: 55.096,77.546 56.159,79.811
  rectangle net GND: 56.185,94.742 62.103,96.545
  rectangle net GND: 89.662,99.035 90.449,104.292
  rectangle net BAT+: 96.114,93.853 97.79,95.936
Bottom Layer:
  rectangle net GND: 100.813,83.718 103.683,97.053
  rectangle net BAT+: 60.935,99.492 62.382,101.778
  rectangle net BAT+: 61.163,97.434 62.205,99.771
  rectangle net BAT+: 61.392,97.003 62.205,97.434
  rectangle net NetBAT1_2: 98.679,94.082 100.265,95.961
  rectangle net BAT+: 96.088,93.828 97.765,95.961

## Silkscreen, mask and mechanical layers (free items; w line width, h text height)
Top Overlay:
  circle w0.025: c93.294,73.736 r2.75
  circle w0.025: c100.152,100.787 r2.75
  circle w0.025: c50.216,72.695 r2.75
  circle w0.025: c50.114,100.711 r2.75
  circle w0.508: c63.271,90.653 r0.254
  circle w0.508: c78.969,89.383 r0.254
  lines w0.025: 57.821,104.72 57.821,100.72 63.201,100.72 63.201,104.72 ; 64.201,104.72 64.201,100.72 74.201,100.72 74.201,104.72 ; 75.201,104.72 75.201,100.72 83.39,100.72 83.39,104.72 ; 84.201,104.72 84.201,100.72 94.201,100.72 94.201,104.72 ; 97.893,74.845 103.88,66.998 ; 98.079,72.458 102.847,66.209 109.962,71.638 105.194,77.887 ; 102.942,78.696 108.929,70.85 ; 67.201,62.42 67.201,65.22 70.701,65.22 70.701,62.42 67.201,62.42 ; 79.701,62.42 79.701,65.22 83.201,65.22 83.201,62.42 79.701,62.42
  text "B+" at 95.25,97.968 h1.52 r180
  text "+5v" at 91.415,97.866 h0.76
  text "B-" at 101.168,97.739 h1.52 r180
  text "NTC" at 98.501,96.418 h0.76
  text "GND" at 61.316,78.74 h0.76
  text "3V3" at 58.598,78.689 h0.76
  text "3V3" at 61.9,73.05 h0.76
  text "SWS" at 61.798,70.409 h0.76
  text "GND" at 61.722,67.615 h0.76
  text "G" at 65.761,62.687 h0.76
Bottom Overlay:
  circle w0.025: c75.201,73.72 r1.75
  lines w0.025: 72.201,70.72 78.201,70.72 78.201,76.72 72.201,76.72 72.201,70.72
  text "B+" at 97.18,96.647 h0.76
  text "B-" at 102.565,96.622 h0.76
  text "NTC" at 100.406,96.52 h0.76